# EAGLE board ds3231M-breakout (EAGLE 7.2.0)
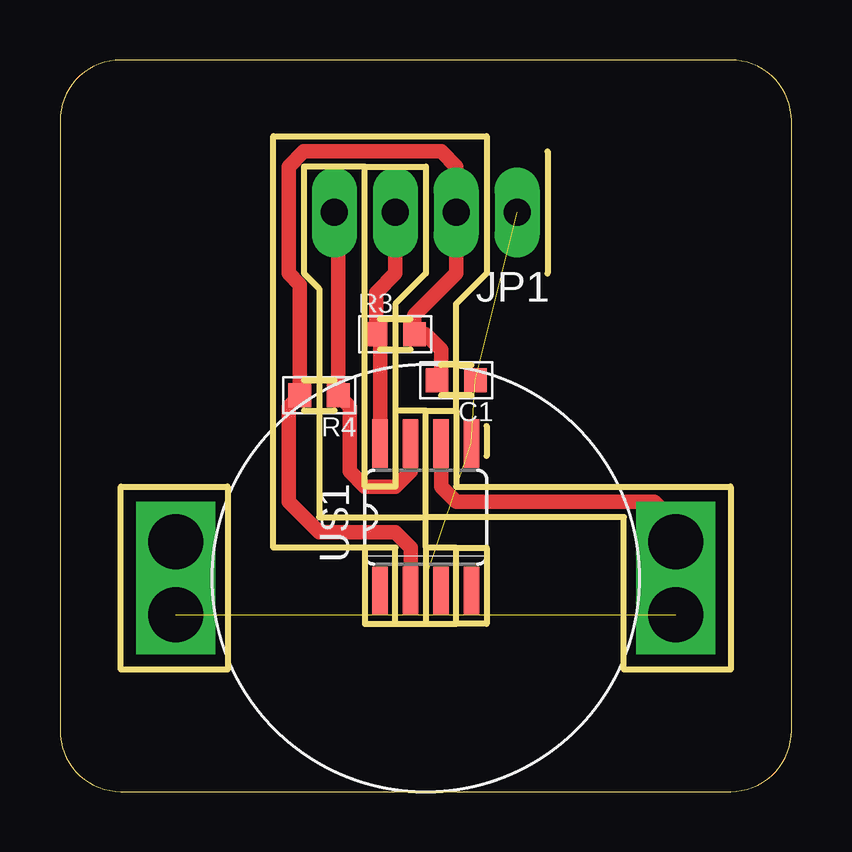
[diagram p0: board, top side]
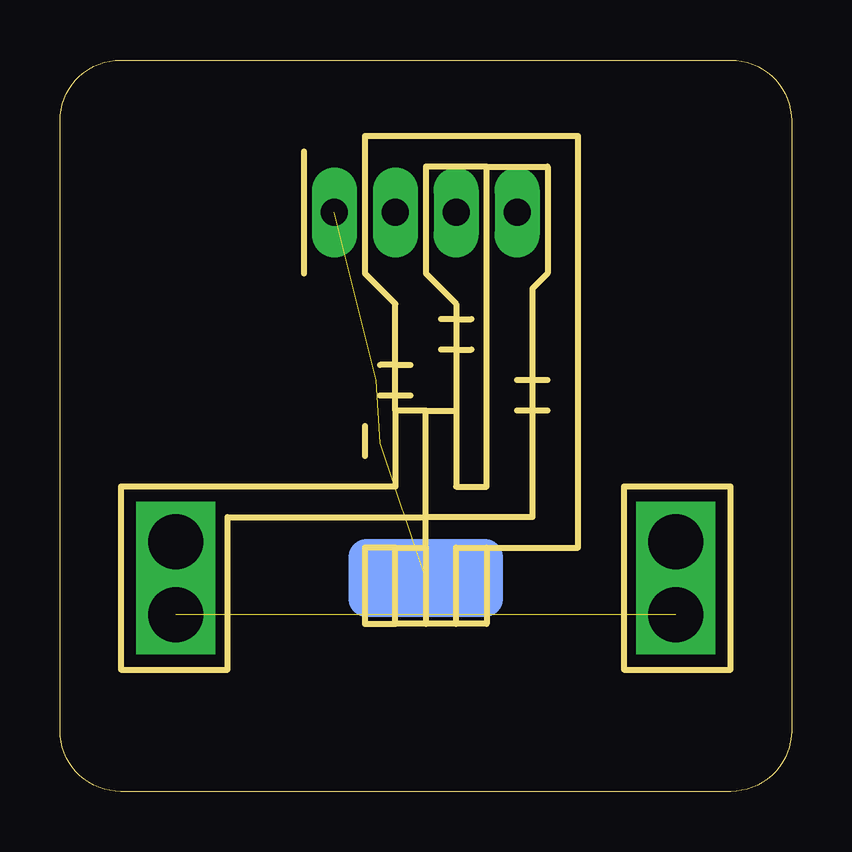
[diagram p1: board, bottom side, seen from below]

Size 30.48 x 30.48 mm. Coordinates in mm from the lower left corner, seen from the top.
Outline: 0,27.94 0,2.54 arc90 2.54,0 27.94,0 arc90 30.48,2.54 30.48,27.94 arc90 27.94,30.48 2.54,30.48 arc90 0,27.94
Copper layers (1*16): Top 0.035mm / dielectric 1.5mm / Bottom 0.035mm
Design rules "default": minimum track width 10mil, minimum drill 24mil, track to track 8mil, track to pad 8mil, pad to pad 8mil, via to via 8mil, smd to smd 8mil, copper to edge 40mil, drill to drill 8mil, minimum pad ring 10mil, minimum via ring 8mil, stop-mask expansion 4mil, vias tented up to drill 0mil, thermal gap 10mil
Milling: 60 lines

## Footprints (pad centres in the part's own frame; a part is rotated, then mirrored left to right if it is on the bottom)
C0603-N = smd 0.95 x 1: 1 -0.8,0; 2 0.8,0
1X04_LONGPADS = drill 1.118 pad 1.88 long: 1 0,0; 2 2.54,0; 3 5.08,0; 4 7.62,0
R0603-N = smd 0.95 x 1: 1 -0.8,0; 2 0.8,0
SO08 = smd 0.66 x 2.032: 1 -1.905,-3.073; 2 -0.635,-3.073; 3 0.635,-3.073; 4 1.905,-3.073; 5 1.905,3.073; 6 0.635,3.073; 7 -0.635,3.073; 8 -1.905,3.073
LINX_2032BAT_HLDER = drill 2.286 square: BAT_POS$1 -10.414,1.524; BAT_POS$2 -10.414,-1.524; BAT_POS$3 10.414,-1.524; BAT_POS$4 10.414,1.524 | smd 6.452 x 3.251 bottom: P$1 0,0

## Placement (x,y rotation side)
C1  0.1uf  [C0603-N]  16.51,17.14 180 top
JP1  [1X04_LONGPADS]  19.05,24.13 180 top
R3  10k  [R0603-N]  13.97,19.05 0 top
R4  10k  [R0603-N]  10.79,16.51 180 top
U$1  DS3231M  [SO08]  15.24,11.43 0 top
U$2  LINX_2032BAT_HLDER  [LINX_2032BAT_HLDER]  15.24,8.89 0 top

## Library data of the parts
C1 R3 R4 = passives-7351
JP1 = SparkFun-Connectors
U$1 U$2 = _my-parts

## Nets
GND: C1.1 JP1.1 U$1.5 U$2.P$1
N$2: U$1.6 U$2.BAT_POS$1 U$2.BAT_POS$2 U$2.BAT_POS$3 U$2.BAT_POS$4
SCL: JP1.3 R3.1 U$1.8
SDA: JP1.4 R4.1 U$1.7
VCC: C1.2 JP1.2 R3.2 R4.2 U$1.2

## Tracks (layer width: path | path; a pad name or v marks a point on that pad's centre or on a via)
GND  (3 unrouted)
N$2  (1 unrouted)
  Top 0.61: U$1.6 15.88,12.7 16.51,12.06 24.77,12.06 25.4,11.43 25.4,10.67 U$2.BAT_POS$4 U$2.BAT_POS$3 | U$2.BAT_POS$1 U$2.BAT_POS$2
SCL
  Top 0.61: U$1.8 13.34,18.89 R3.1 13.17,20.79 13.97,21.59 JP1.3
SDA
  Top 0.61: U$1.7 14.61,13.34 13.97,12.7 12.7,12.7 12.06,13.34 12.06,16.04 R4.1 11.6,23.96 JP1.4
VCC
  Top 0.61: C1.2 15.88,17.31 15.88,18.41 15.24,19.05 R3.2 14.77,19.85 16.51,21.59 JP1.2 16.51,26.04 15.88,26.67 10.16,26.67 9.53,26.04 9.53,21.59 9.99,21.12 R4.2 9.53,16.04 9.53,12.06 10.79,10.79 13.97,10.79 14.61,10.16 U$1.2